# Altium PCB Wakame.PcbDoc (part 1 of 2)
Units mm, origin at the board's own origin, x right, y up, seen from the top; angles counter-clockwise.
Board outline 150 x 150 mm, 5 copper layers (FrontLayer, MidLayer1, MidLayer2, MidLayer3, BackLayer); 108 components, 145 nets, 766 pads, 136 vias.
Unrouted connection lines stored in the file: 5.
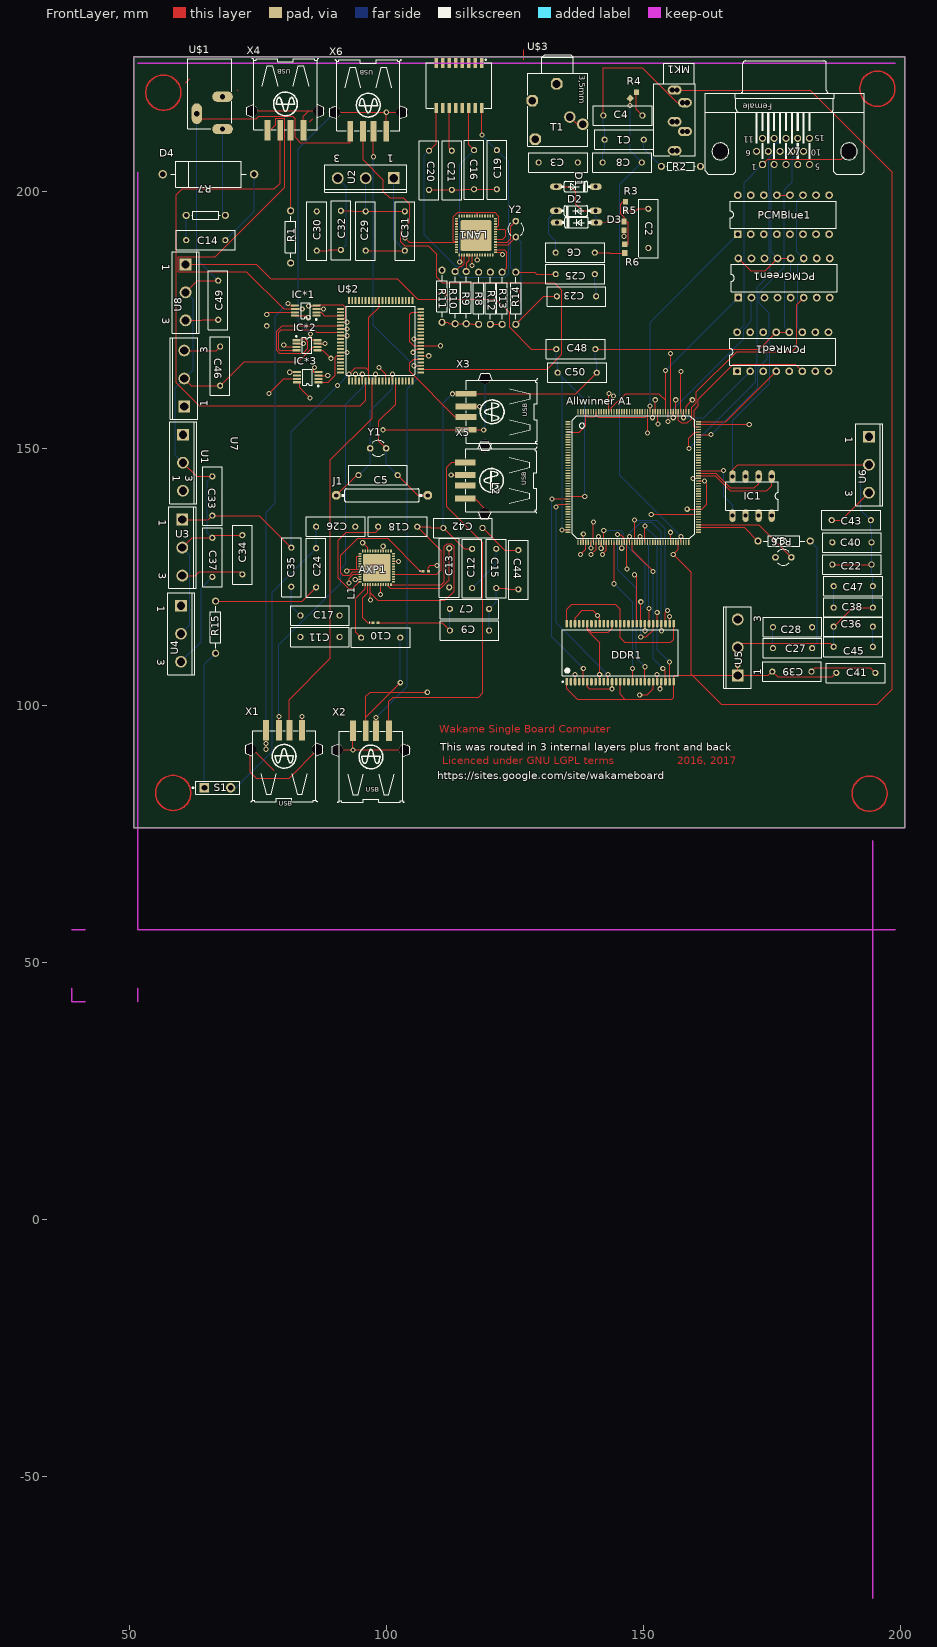
[diagram p0: FrontLayer view]
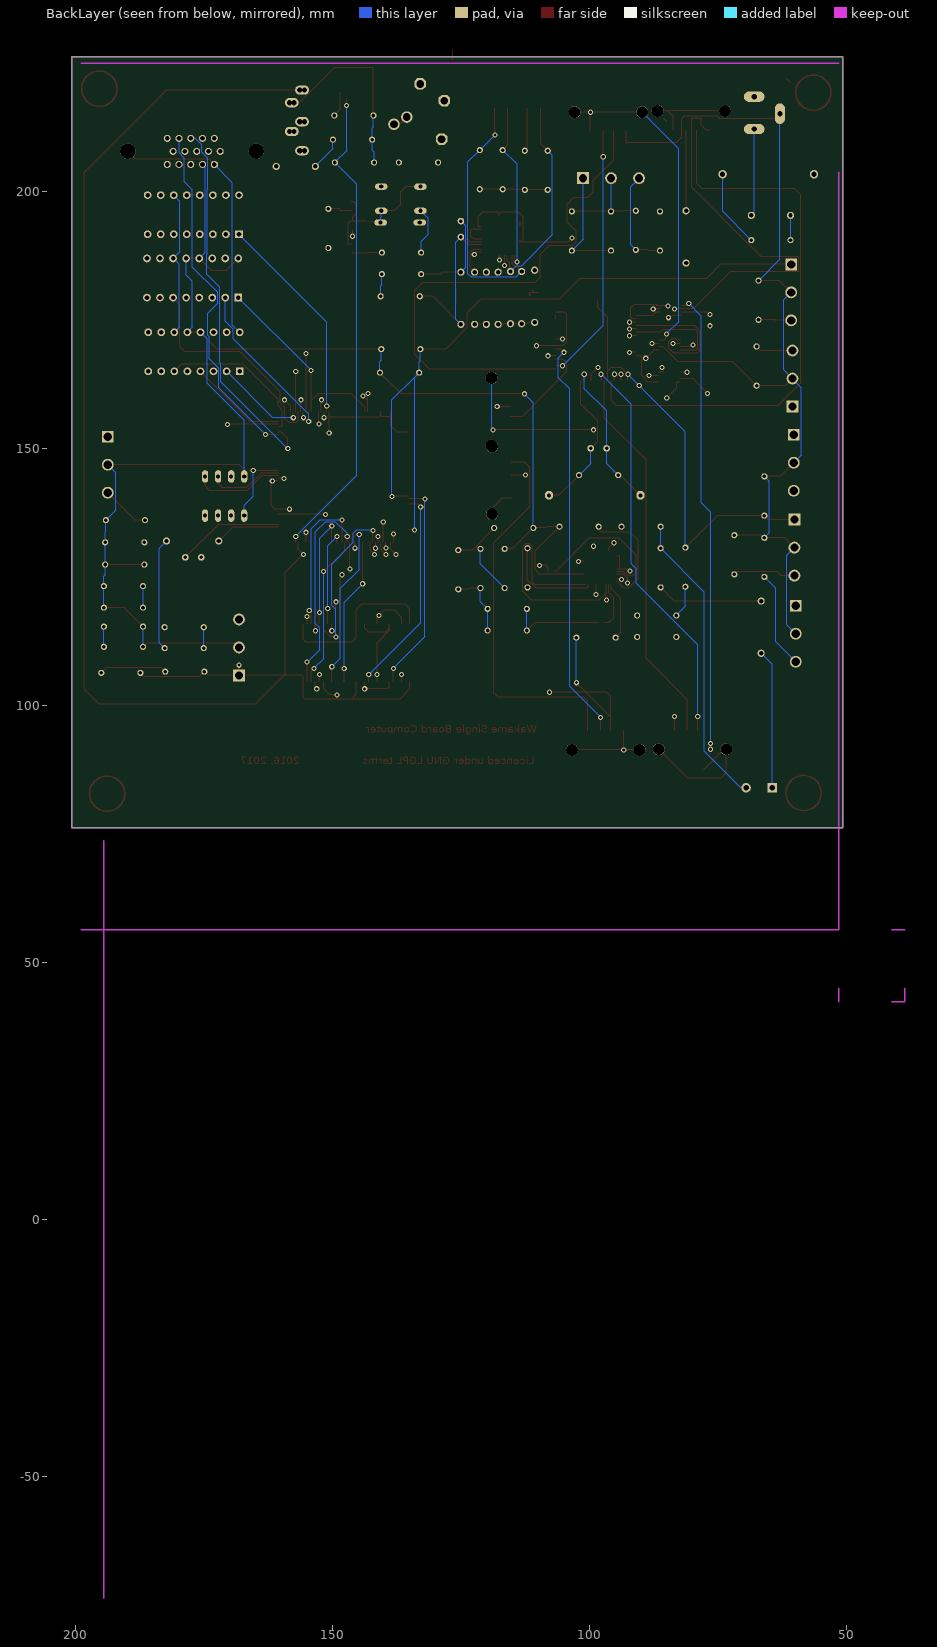
[diagram p1: BackLayer view, seen from below]
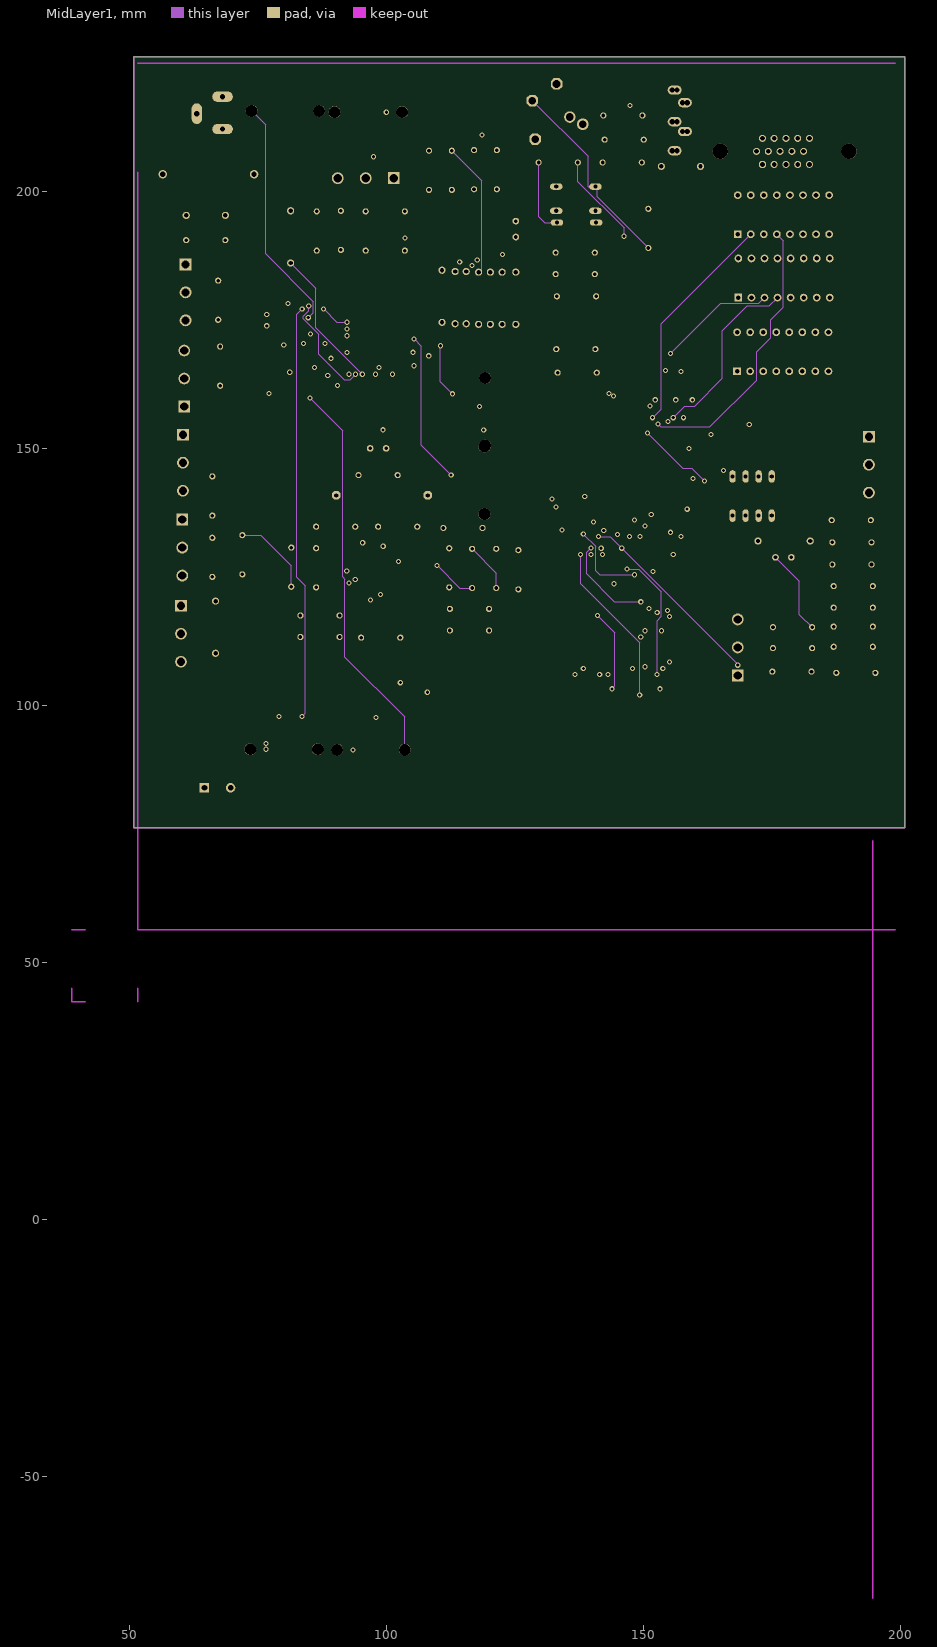
[diagram p2: MidLayer1]
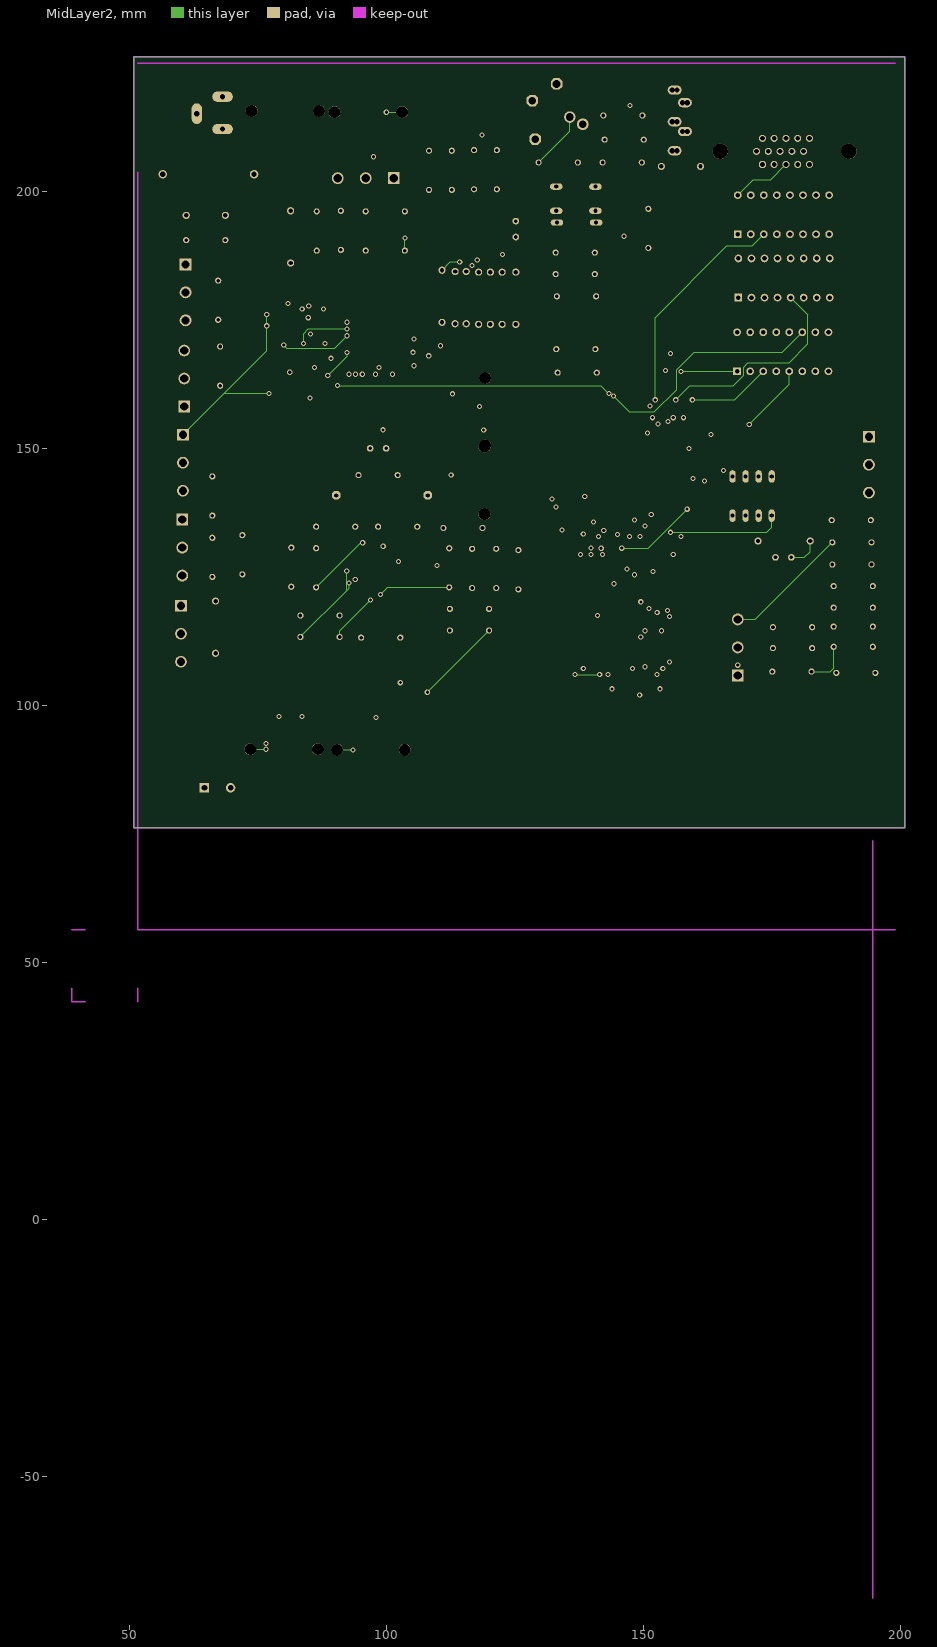
[diagram p3: MidLayer2]
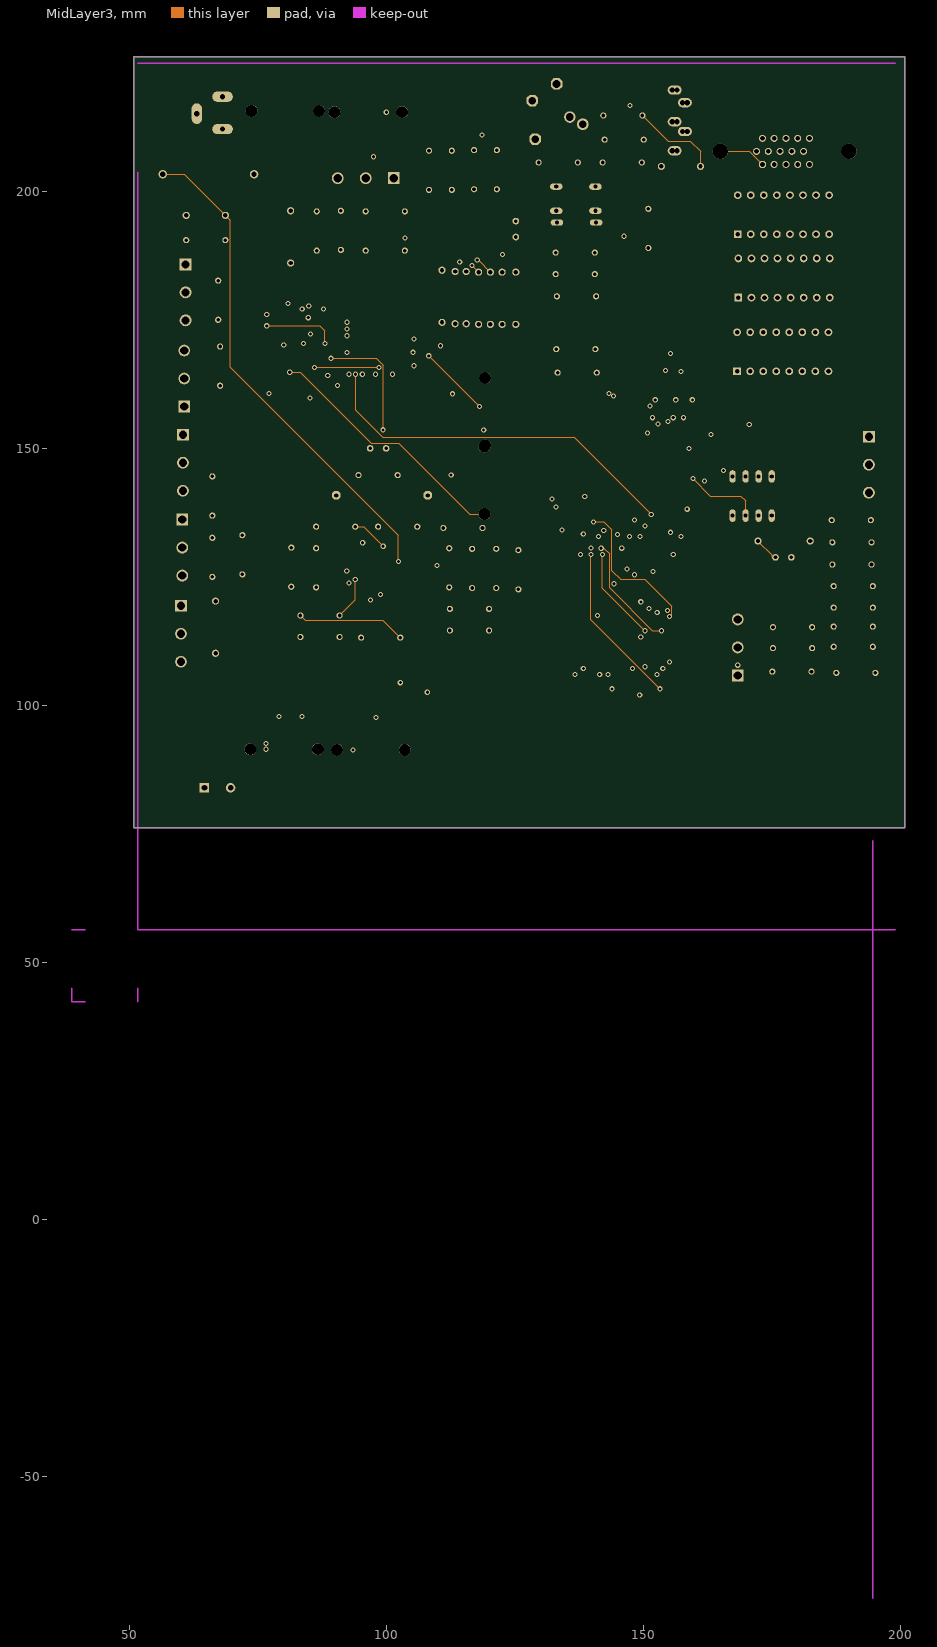
[diagram p4: MidLayer3]

## Layer stack, top to bottom
FrontLayer: signal copper 0.0356
Dielectric: prepreg 0.32, FR-4, Dk 4.8
MidLayer1: signal copper 0.0356
Dielectric: prepreg 0.32, FR-4, Dk 4.8
MidLayer2: signal copper 0.0356
Dielectric: prepreg 0.32, FR-4, Dk 4.8
MidLayer3: signal copper 0.0356
Dielectric: core 0.32, FR-4, Dk 4.8
BackLayer: signal copper 0.0356

## Board outline
50.8,76.2 200.8,76.2 200.8,226.2 50.8,226.2

## Design rules (kind name [scope] priority, off if disabled: settings)
Clearance [All] p1: gap=0.2
PolygonConnect [All] p1: connectstyle=Relief reliefconductorwidth=0.254 reliefentries=4 polygonreliefangle="90 Angle"
RoutingLayers RoutingLayers_1 [All] p1: top layer_v5=TRUE mid layer 1_v5=TRUE mid layer 2_v5=TRUE mid layer 3_v5=TRUE bottom layer_v5=TRUE
RoutingLayers [All] p2: top layer_v5=TRUE mid layer 1_v5=FALSE mid layer 2_v5=FALSE mid layer 3_v5=FALSE bottom layer_v5=FALSE
RoutingVias [All] p1: holewidth=0.6 width=1 viastyle="Through Hole" minholewidth=0.711 minwidth=1.27 maxholewidth=0.711 maxwidth=1.27
SilkscreenOverComponentPads [IsPad] p1: minsilkscreentomaskgap=0.254
SolderMaskExpansion [All] p1: expansion=0.102
TestPointUsage [All] p1: valid=0 allowmultiple=FALSE
Testpoint [All] p1: side=3 testpointundercomponent=TRUE minsize=1.016 maxsize=2.54 preferedsize=1.524 minholesize=0 maxholesize=1.016 preferedholesize=0.813 testpointgrid=0.025 style=297 order=0-112345678
Width [All] p1: maxlimit=0.2 minlimit=0.2 preferedwidth=0.2
22 further rules are at their usual default settings.

## Components (designator, comment, footprint, x,y, rotation, side; value= is the part's Value field where it differs from the comment)
"Allwinner A1" "ALLWINNER-A13" PG-LQFP-176-2 147.955,144.399 r0 top (schematic designator "Allwinner A13")
AXP1 "AXP202" QFN48 100.584,129.286 r0 top (schematic designator AXP202)
C1 "Cap" RAD-0.3 146.177,210.058 r180 top
C2 "." RAD-0.3 150.876,192.786 r90 top
C3 "." RAD-0.3 133.35,205.613 r0 top
C4 "Cap" RAD-0.3 145.923,214.757 r180 top
C5 "Cap" RAD-0.3 98.298,144.78 r0 top
C6 "." RAD-0.3 136.652,188.087 r0 top
C7 "Cap" RAD-0.3 116.078,118.745 r0 top (schematic designator C34)
C8 "Cap" RAD-0.3 145.796,205.613 r180 top
C9 "Cap" RAD-0.3 116.078,114.554 r0 top
C10 "Cap" RAD-0.3 98.806,113.157 r0 top
C11 "Cap" RAD-0.3 86.995,113.284 r180 top
C12 "Cap" RAD-0.3 116.586,126.619 r90 top
C13 "Cap" RAD-0.3 112.141,126.746 r270 top
C14 "Cap" RAD-0.3 64.77,190.5 r0 top
C15 "Cap" RAD-0.3 121.285,126.619 r270 top (schematic designator C23)
C16 "Cap" RAD-0.3 116.967,204.216 r270 top
C17 "Cap" RAD-0.3 86.995,117.475 r180 top
C18 "Cap" RAD-0.3 102.108,134.747 r0 top (schematic designator C38)
C19 "Cap" RAD-0.3 121.412,204.216 r270 top
C20 "Cap" RAD-0.3 108.204,204.089 r270 top
C21 "Cap" RAD-0.3 112.649,204.089 r270 top
C22 "Cap" RAD-0.3 190.5,127.381 r180 top
C23 "Cap" RAD-0.3 136.906,179.578 r180 top
C24 "Cap" RAD-0.3 86.233,126.746 r90 top
C25 "Cap" RAD-0.3 136.652,183.896 r0 top
C26 "Cap" RAD-0.3 90.043,134.747 r180 top
C27 "Cap" RAD-0.3 178.943,111.125 r180 top (schematic designator C31)
C28 "Cap" RAD-0.3 178.943,115.189 r0 top
C29 "Cap" RAD-0.3 95.885,192.278 r270 top
C30 "Cap" RAD-0.3 86.36,192.278 r270 top
C31 "Cap" RAD-0.3 103.505,192.278 r270 top
C32 "Cap" RAD-0.3 91.059,192.405 r90 top
C33 "Cap" RAD-0.3 66.04,140.716 r270 top (schematic designator C50)
C34 "Cap" RAD-0.3 71.882,129.286 r90 top
C35 "Cap" RAD-0.3 81.407,126.873 r90 top
C36 "Cap" RAD-0.3 190.754,111.379 r0 top
C37 "Cap" RAD-0.3 66.04,128.778 r90 top
C38 "Cap" RAD-0.3 190.754,115.316 r0 top
C39 "Cap" RAD-0.3 178.816,106.553 r180 top
C40 "Cap" RAD-0.3 190.5,131.699 r0 top (schematic designator C47)
C41 "Cap" RAD-0.3 191.262,106.299 r180 top
C42 "Cap" RAD-0.3 114.808,134.493 r0 top
C43 "Cap" RAD-0.3 190.373,136.017 r0 top
C44 "Cap" RAD-0.3 125.603,126.365 r90 top
C45 "Cap" RAD-0.3 190.754,118.999 r180 top
C46 "Cap" RAD-0.3 67.564,165.989 r270 top
C47 "Cap" RAD-0.3 190.754,123.19 r180 top
C48 "Cap" RAD-0.3 136.779,169.291 r180 top
C49 "Cap" RAD-0.3 67.183,178.816 r90 top
C50 "Cap" RAD-0.3 137.033,164.719 r180 top
D1 "." DIODE_DO35-7 136.779,200.914 r180 top
D2 "." DIODE_DO35-7 136.779,196.215 r0 top
D3 "." DIODE_DO35-7 136.906,193.929 r0 top
D4 "D Zener" DIODE-0.7 65.278,203.327 r180 top
DDR1 "K4S510432B-TC75" 54_TSOP2_400AF_N 145.415,110.236 r90 top
IC1 "AT25*P" DIL08 171.069,140.716 r180 top
IC*1 "Micrel MIC2026" 8uSOP 84.201,176.784 r90 top
IC*2 "Micrel MIC2026" 8uSOP 84.455,170.053 r270 top
IC*3 "Micrel MIC2026" 8uSOP 84.582,163.83 r90 top
J1 "ZeroOhm" 0R/10 100.33,140.843 r180 top (schematic designator J25)
L1 "Inductor" 0402-A 97.79,116.078 r0 top
L2 "Inductor" 0402-A 107.569,126.111 r0 top
LAN1 "LAN9500" QFN56 117.348,191.389 r90 top (schematic designator LAN9500)
MK1 "Mic2" ST-3150-5N 156.845,224.9 r0 top
PCMBlue1 "AD558JD" DIP16 177.165,195.453 r0 top
PCMGreen1 "AD558JD" DIP16 177.292,183.134 r0 top
PCMRed1 "AD558JD" DIP16 177.038,168.783 r0 top
R1 "Res2" AXIAL-0.4 81.28,191.135 r270 top
R2 "Res1" AXIAL-0.3 157.226,204.851 r180 top
R3 "Res3" J1-0603#1 146.431,197.104 r90 top
R4 "Res3" J1-0603#2 147.955,218.694 r45 top
R5 "Res3" J1-0603#1 146.177,193.294 r90 top
R6 "Res3" J1-0603#1 146.304,188.849 r90 top
R7 "Res1" AXIAL-0.3 64.77,195.326 r180 top
R8 "Res2" AXIAL-0.4 117.856,179.197 r90 top (schematic designator R2)
R9 "Res2" AXIAL-0.4 115.443,179.324 r90 top
R10 "Res2" AXIAL-0.4 113.284,179.324 r90 top
R11 "Res2" AXIAL-0.4 110.744,179.578 r90 top
R12 "Res2" AXIAL-0.4 120.142,179.197 r90 top
R13 "Res2" AXIAL-0.4 122.428,179.197 r270 top
R14 "Res2" AXIAL-0.4 125.095,179.197 r270 top
R15 "Res2" AXIAL-0.4 66.675,115.189 r270 top
R16 "Res2" AXIAL-0.4 177.292,131.953 r180 top
S1 "SW-PB" SPST-2 67.056,83.947 r0 top
T1 "749010012A" 749010012A 114.046,220.599 r180 top
U1 "L78L05ABZ" MAX247 60.325,147.193 r270 top
U2 "3.3V positive regulator" MAX247 95.885,202.565 r180 top
U3 "3.3V positive regulator (VCC)" MAX247 60.198,130.683 r270 top
U4 "3.0V positive regulator" MAX247 59.944,113.919 r270 top
U5 "1.3V positive regulator (VDD)" MAX247 168.275,111.252 r90 top
U6 "1.2V positive regulator" MAX247 193.802,146.812 r270 top
U7 "1.5V positive regulator" MAX247 60.579,163.576 r90 top
U8 "2.0V positive regulator" MAX247 60.833,180.34 r270 top
U$1 "PWR" SCD-014-A 65.532,225.933 r180 top (schematic designator U$6)
U$2 "USB2507" TQFP80 98.806,170.942 r180 top (schematic designator U$3)
U$3 "35MMSTEREOJACK" PG203J 143.383,218.44 r0 top (schematic designator U$4)
X1 "USB-A003" USB-A003 80.01,81.153 r0 top
X2 "USB-A003" USB-A003 96.901,81.026 r0 top (schematic designator X1)
X3 "USB-A003" USB-A003 129.413,157.099 r90 top
X4 "USB-A003" USB-A003 80.264,225.933 r180 top
X5 "USB-A003" USB-A003 129.286,143.764 r90 top
X6 "USB-A003" USB-A003 96.393,225.679 r180 top
X7 "HF15H" HDF15H 177.419,207.772 r180 top (schematic designator X1)
Y1 "XTAL" R38 98.298,149.987 r90 top
Y2 "XTAL" R38 125.095,192.659 r0 top
Y3 "XTAL" R38 177.165,128.778 r270 top

## Footprints (in the part's own frame and the unit in brackets; to place one, negate y for a bottom-side part, rotate by r counter-clockwise, add the part's x,y. Pads: shape width x height; smd on the part's side, far side on the other; paste and mask are expansions set on the pad)
0R/10 [mil]
  oct 63x63 hole 32: 1(-300,0) 2(400,0)
  silkscreen extent -262,-50 362,50
8uSOP [mm] "Shrink Small Outline; 8 Leads; Body Width 3 mm; Pitch 0.65 mm"
  rect 0.4x1.55 smd: 1(-0.975,-2.075) 2(-0.325,-2.075) 3(0.325,-2.075) 4(0.975,-2.075) 5(0.975,2.075) 6(0.325,2.075) 7(-0.325,2.075) 8(-0.975,2.075)
  silkscreen extent -1.85,-2.2 1.55,0.9
54_TSOP2_400AF_N [mm] "54-Pin Small Outline Package 0.8 mm Pitch, IPC Medium Density"
  oval 1.5x0.5 smd: 1(-5.65,10.4) 2(-5.65,9.6) 3(-5.65,8.8) 4(-5.65,8) 5(-5.65,7.2) 6(-5.65,6.4) 7(-5.65,5.6) 8(-5.65,4.8) 9(-5.65,4) 10(-5.65,3.2) 11(-5.65,2.4) 12(-5.65,1.6) 13(-5.65,0.8) 14(-5.65,0) 15(-5.65,-0.8) 16(-5.65,-1.6) 17(-5.65,-2.4) 18(-5.65,-3.2) 19(-5.65,-4) 20(-5.65,-4.8) 21(-5.65,-5.6) 22(-5.65,-6.4) 23(-5.65,-7.2) 24(-5.65,-8) 25(-5.65,-8.8) 26(-5.65,-9.6) 27(-5.65,-10.4) 28(5.65,-10.4) 29(5.65,-9.6) 30(5.65,-8.8) 31(5.65,-8) 32(5.65,-7.2) 33(5.65,-6.4) 34(5.65,-5.6) 35(5.65,-4.8) 36(5.65,-4) 37(5.65,-3.2) 38(5.65,-2.4) 39(5.65,-1.6) 40(5.65,-0.8) 41(5.65,0) 42(5.65,0.8) 43(5.65,1.6) 44(5.65,2.4) 45(5.65,3.2) 46(5.65,4) 47(5.65,4.8) 48(5.65,5.6) 49(5.65,6.4) 50(5.65,7.2) 51(5.65,8) 52(5.65,8.8) 53(5.65,9.6) 54(5.65,10.4)
  silkscreen extent -5.77,-11.3 4.5,11.32, body extent -5.08,-11.23 5.08,11.23, height 1.2
0402-A [mm] "Chip Inductor; Body 1 x 0.5 mm (LxW typ)"
  rect 0.6x0.5 smd: 1(-0.5,0) 2(0.5,0)
  silkscreen extent -1.1,-0.15 -1.1,0.15
749010012A [mm] "10/100 Base-T SMD Transformer 1 Port"
  rect 0.64x1.91 smd: 1(-4.445,-4.385) 2(-3.175,-4.385) 3(-1.905,-4.385) 4(-0.635,-4.385) 5(0.635,-4.385) 6(1.905,-4.385) 7(3.175,-4.385) 8(4.445,-4.385) 9(4.445,4.385) 10(3.175,4.385) 11(1.905,4.385) 12(0.635,4.385) 13(-0.635,4.385) 14(-1.905,4.385) 15(-3.175,4.385) 16(-4.445,4.385)
  silkscreen extent -6.35,-5.1 6.35,4.4, body extent -6.35,-4.7 6.35,4.7, height 6.35
AXIAL-0.3 [mm] "Resistor; 2 Leads"
  round 1.4 hole 0.85: 1(-3.81,0) 2(3.81,0)
  silkscreen extent -2.77,-0.76 2.77,0.76
AXIAL-0.4 [mm] "Resistor; 2 Leads"
  round 1.4 hole 0.85: 1(-5.08,0) 2(5.08,0)
  silkscreen extent -4.06,-1.02 4.06,1.02
DIL08 [mil]
  oval 48x96 hole 32: 1(-150,-150) 2(-50,-150) 3(50,-150) 4(150,-150) 5(150,150) 6(50,150) 7(-50,150) 8(-150,150)
  silkscreen extent -200,-110 200,110
DIODE-0.7 [mm] "Zener Diode; 2 Leads"
  round 1.65 hole 1: 1(-8.89,0) 2(8.89,0)
  silkscreen extent -7.37,-2.54 7.37,2.54
DIODE_DO35-7 [mil]
  oval 96x48 hole 32: A(150,0) C(-150,0)
  silkscreen extent -115,-40 115,40
DIP16 [mm] "DIP; 16 Leads; Row Spacing 7.62 mm; Pitch 2.54 mm"
  rect 1.5x1.5 hole 0.9: 1(-8.89,-3.81)
  round 1.5 hole 0.9: 2(-6.35,-3.81) 3(-3.81,-3.81) 4(-1.27,-3.81) 5(1.27,-3.81) 6(3.81,-3.81) 7(6.35,-3.81) 8(8.89,-3.81) 9(8.89,3.81) 10(6.35,3.81) 11(3.81,3.81) 12(1.27,3.81) 13(-1.27,3.81) 14(-3.81,3.81) 15(-6.35,3.81) 16(-8.89,3.81)
  silkscreen extent -10.3,-2.65 10.3,2.65
HDF15H [mil]
  round 119 hole 119: 1(-492.13,0) 1(493,0)
  oct 54x54 hole 36: 1(171,100)
  round 54 hole 36: 2(81,100) 3(-9.57,100) 4(-99.57,100) 5(-189.57,100) 6(216,0) 7(126,0) 8(36,0) 9(-54.57,0) 10(-144.57,0) 11(171,-100) 12(81,-100) 13(-9.57,-100) 14(-99.57,-100) 15(-189.57,-100)
  silkscreen extent -610,-693 610,175
J1-0603#1 [mm] "Chip Resistor; Body 1.6 x 0.8 mm (LxW typ)"
  rect 1.1x1 smd: 1(-0.85,0) 2(0.85,0)
J1-0603#2 [mm] "Chip Resistor; Body 1.6 x 0.8 mm (LxW typ)"
  rect 1.1x1 smd: 1(-0.85,0)
  rect 1x1.1 smd rot 135: 2(0.85,0)
MAX247 [mm] "SIP; 3 Leads; Body 20 x 15.6 x 5 mm (typ); Pitch 5.45 mm"
  rect 2.3x2.3 hole 1.6: 1(-5.45,0)
  round 2.3 hole 1.6: 2(0,0) 3(5.45,0)
  silkscreen extent -7.95,-2.6 7.95,2.7
PG203J [mil]
  oct 88.5x88.5 hole 59: GND(-408,97) LEFT1(-572,-326) LEFT2(-593,-31)
  round 88.5 hole 59: RIGHT1(-207,-212) RIGHT2(-306,-157)
  silkscreen extent -630,-380 -170,320
PG-LQFP-176-2 [mil]
  rect 10x40 smd: AGND(247,-500) AVCC(286,-500) DDR3_A0(-49.21,-500) DDR3_A1(-285.43,-500) DDR3_A2(-9.84,-500) DDR3_A3(-29.53,-500) DDR3_A4(-305.12,-500) DDR3_A5(10,-500) DDR3_A6(-246.06,-500) DDR3_A7(89,-500) DDR3_A8(-226.38,-500) DDR3_A9(50,-500) DDR3_A10(-364.17,-500) DDR3_A11(-206.69,-500) DDR3_A12(-324.8,-500) DDR3_A13(30,-500) DDR3_A14(-187.01,-500) DDR3_BA0(-68.9,-500) DDR3_BA1(-344.49,-500) DDR3_BA2(-108.27,-500) DDR3_CAS(-147.64,-500) DDR3_CK(-423.23,-500) DDR3_CK_N(-403.54,-500) DDR3_CKE(-383.86,-500) DDR3_ODT(109,-500) DDR3_RAS(-167.32,-500) DDR3_RST(69,-500) DDR3_WE(-127.95,-500) HPBP(168,-500) HPCOM(207,-500) HPOUTL(148,-500) HPOUTR(227,-500) LCD_D2/PD2(128,500) LCD_D3/PD3(148,500) LCD_D4/PD4(168,500) LCD_D5/PD5(188,500) LCD_D6/PD6(207,500) LCD_D7/PD7(227,500) LCD_D10/PD10(266,500) LCD_D11/PD11(286,500) LCD_D12/PD12(306,500) LCD_D13/PD13(325,500) LCD_D14/PD14(345,500) LCD_D15/PD15(365,500) LCD_D18/PD18(384,500) LCD_D19/PD19(404,500) LCD_D20/PD20(424,500) LRADC(384,-500) MICIN1(345,-500) NDQ0/SDC2_D0/PC8(-383.86,500) NDQ1/SDC2_D1/PC9(-344.49,500) NDQ2/SDC2_D2/PC10(-324.8,500) NDQ3/SDC2_D3/PC11(-305.12,500) NDQ4/SDC2_D4/PC12(-265.75,500) NDQ5/SDC2_D5/PC13(-246.06,500) NDQ6/SDC2_D6/PC14(-226.38,500) NDQ7/SDC2_D7/PC15(-206.69,500) NDQS/PC19(-147.64,500) NMI_N(-68.9,500) NRB0/SDC2_CMD/PC6(-423.23,500) NRB1/SDC2_CLK/PC7(-403.54,500) PB3/EINT17(89,500) PB17(-127.95,500) PB18(-108.27,500) PG0/EINT0(-9.84,500) PG1/EINT1(10,500) PG2/EINT2(30,500) PG3/UART1_TX/EINT3(50,500) PG4/UART1_RX/EINT14(69,500) RESET_N(-88.58,500) TPX2(404,-500) TPY2(424,-500) UBOOT(-49.21,500) V33_HP(188,-500) VCC3(247,500) VCC4(-167.32,500) VCC4_DRAM(-265.75,-500) VCC5_DRAM(-88.58,-500) VDD2_INT(128,-500) VDD5_CPU(-29.53,500) VDD5_INT(109,500) VDD6_CPU(-187.01,500) VDD7_CPU(-285.43,500) VDD8_CPU(-364.17,500) VMIC(365,-500) VRA1(325,-500) VRA2(306,-500) VRP(266,-500)
  rect 40x10 smd: CSI_D0/SDC_D0/PE4(500,148) CSI_D2/SDC2_D2/PE6(500,188) CSI_D3/SDC2_D3/PE7(500,207) CSI_D4/SDC2_CMD/PE8(500,227) CSI_D5/SDC2_CLK/PE9(500,247) CSI_D6/UART1_TX/PE10(500,266) CSI_D7/UART1_RX/PE11(500,286) CSI_DI/SDC2_DI/PE5(500,168) CSI_HSYNC/SP2_MOSI/P(500,109) CSI_MCLK/SPI2_CLK/EI(500,89) CSI_PCLK/SPI2_CS0/EI(500,69) CSI_VSYNC/SPI2_MISO/(500,128) DDR3_D0(-500,10) DDR3_D1(-500,-344.49) DDR3_D2(-500,30) DDR3_D3(-500,-364.17) DDR3_D4(-500,69) DDR3_D5(-500,-423.23) DDR3_D6(-500,50) DDR3_D7(-500,-383.86) DDR3_D9(-500,-49.21) DDR3_D10(-500,-324.8) DDR3_D11(-500,-29.53) DDR3_D12(-500,-265.75) DDR3_D13(-500,-68.9) DDR3_D14(-500,-305.12) DDR3_D15(-500,-88.58) DDR3_DM0(-500,-127.95) DDR3_DM1(-500,-108.27) DDR3_DQS0(-500,-167.32) DDR3_DQS0_N(-500,-187.01) DDR3_DQS1(-500,-206.69) DDR3_DQS1_N(-500,-226.38) DDR3_R8(-500,-285.43) DZQ(-500,109) LCD_CLK/PD24(500,365) LCD_D21/PD21(500,424) LCD_D22/PD22(500,404) LCD_D23/PD23(500,384) LCD_DE/PD25(500,345) LCD_HSYNC/PD26(500,325) LCD_VSYNC/PD27(500,306) NALE/SPIO_MISO/PCI(-500,306) NC(500,-226.38) NCE0(-500,404) NCE1/SPIO0/PC3(-500,384) NCLE/SPIO_CLK/PC2(-500,325) NRE(-500,424) NWE/SPIO_MOSI/PC0(-500,286) PB2/EINT16(500,-147.64) PB4_EINT18(500,-127.95) PB10/EINT24(-500,247) PB15(500,-108.27) PB16(500,-88.58) PG9/SPI1_CS0/UART3_T(-500,207) PG10/SPI1_CLK/UART3_(-500,188) PG11/SPI1_MOSI/EINT1(-500,168) PG12/SPI1_MISO/UART3(-500,148) SDC0/PF1(500,-49.21) SDC0_CLK/PF2(500,-9.84) SDC0_CMD/PF3(500,10) SDC0_D3/PF4(500,30) SDC0_DI/PF0(500,-68.9) SDCO_D2/PF5(500,50) SVREF(-500,89) TPX1(500,-423.23) TPY1(500,-403.54) TWI0-SCK/PB0(500,-187.01) TWIO-SDA/PB1(500,-167.32) UDM0(500,-344.49) UDM1(500,-305.12) UDP0(500,-324.8) UDP1(500,-285.43) V33_USB(500,-265.75) VCC1(-500,345) VCC1_DRAM(-500,-9.84) VCC2(500,-206.69) VCC2_DRAM(-500,-147.64) VCC3_DRAM(-500,-403.54) VDD1_CPU(-500,365) VDD1_INT(-500,-246.06) VDD2_CPU/PB10/EINT24(-500,266) VDD3-INT(500,-246.06) VDD3_CPU(-500,227) VDD4_CPU(-500,128) VDD4_INT(500,-29.53) X24MIN(500,-364.17) X24OUT(500,-383.86)
  silkscreen extent -512,-468 469,469
QFN48 [mil]
  rrect30% 22x12 smd: ACIN(29,-50.79) ACIN1(29,-70.47) BACKUP(29,-109.84) CHGLED(29,9) DC3SET(29,-129.53) DCDC2(-228.94,-168.9) GPIO2(-228.94,-70.47) GPIO3(-228.94,-31.1) IPSOUT(29,-11.42) IPSOUT1(29,-31.1) LDO1(29,-149.21) LDO2(-228.94,-208.27) LDO4(-228.94,-188.58) LX2(-228.94,-129.53) N_OE(-228.94,-50.79) N_VBUSEN(-228.94,-90.16) PGND2(-228.94,-149.21) PWREN(29,-168.9) PWROK(29,-208.27) SCK(-228.94,-11.42) SDA(-228.94,9) VBUS(29,-90.16) VIN2(-228.94,-109.84) VINT(29,-188.58)
  rrect30% 12x22 smd: AGND(-31.1,-228.94) APS(-50.79,-228.94) BAT(-11.42,29) BAT1(-31.1,29) BATSENSE(-90.16,29) BIAS(-11.42,-228.94) CHSENSE(-109.84,29) DCDC3(-129.53,-228.94) EXTEN(-70.47,-228.94) GPIO0(-90.16,-228.94) GPIO1(-109.84,-228.94) IRQ(-208.27,29) LDO3(-70.47,29) LDO3IN(-50.79,29) LDO24IN(-208.27,-228.94) LX(-168.9,-228.94) LX1(-149.21,29) PGND1(-168.9,29) PGND3(-149.21,-228.94) PWRON(-188.58,29) TS(9,29) VIN1(-129.53,29) VIN3(-188.58,-228.94) VREF(9,-228.94)
  rrect5% 209x209 smd: EXP(-100,-100)
QFN56 [mil]
  rrect50% 24x12 smd: 1(-149.61,128) 2(-149.61,109) 3(-149.61,89) 4(-149.61,69) 5(-149.61,50) 6(-149.61,30) 7(-149.61,10) 8(-149.61,-9.84) 9(-149.61,-29.53) 10(-149.61,-49.21) 11(-149.61,-68.9) 12(-149.61,-88.58) 13(-149.61,-108.27) 14(-149.61,-127.95) 29(150,-127.95) 30(150,-108.27) 31(150,-88.58) 32(150,-68.9) 33(150,-49.21) 34(150,-29.53) 35(150,-9.84) 36(150,10) 37(150,30) 38(150,50) 39(150,69) 40(150,89) 41(150,109) 42(150,128)
  rrect50% 12x24 smd: 15(-127.95,-149.61) 16(-108.27,-149.61) 17(-88.58,-149.61) 18(-68.9,-149.61) 19(-49.21,-149.61) 20(-29.53,-149.61) 21(-9.84,-149.61) 22(10,-149.61) 23(30,-149.61) 24(50,-149.61) 25(69,-149.61) 26(89,-149.61) 27(109,-149.61) 28(128,-149.61) 43(128,150) 44(109,150) 45(89,150) 46(69,150) 47(50,150) 48(30,150) 49(10,150) 50(-9.84,150) 51(-29.53,150) 52(-49.21,150) 53(-68.9,150) 54(-88.58,150) 55(-108.27,150) 56(-127.95,150)
  rrect10% 237x237 smd: EPAD(0,0)
R38 [mm] "Crystal, Thru-Hole; 2 Leads; Body 3.1 x 8.2 mm (Dia.xH)"
  round 1.3 hole 0.7: 1(0,1.55) 2(0,-1.55)
  silkscreen extent -1.55,-1.19 1.55,1.17
RAD-0.3 [mm] "Capacitor; 2 Leads"
  round 1.2 hole 0.7: 1(-3.81,0) 2(3.81,0)
  silkscreen extent -5.71,-1.91 5.71,1.91
SCD-014-A [mil]
  oval 158x79 hole 40: +(-98.43,544) GND1(-98.43,296)
  oval 79x158 hole 40: GND(99,426)
  silkscreen extent -167,4 168,540
SPST-2 [mm] "Circuit Breaker; 2 Leads"
  rect 1.85x1.85 hole 1.1: 1(-2.54,0)
  round 1.85 hole 1.1: 2(2.54,0)
  silkscreen extent -4.89,-1.27 4.28,1.27
ST-3150-5N [mm] "Connector; Stereo Jack, 3.5mm, 5 Position"
  oval 2.7x1.8 all layers, no hole: 1(-0.85,-5.2) 2(1.15,-7.65) 3(-0.85,-11.35) 4(1.15,-13.25) 5(-0.85,-17)
  round 1.2 hole 1: 1A(-1.3,-5.2) 1B(-0.4,-5.2) 2A(0.7,-7.65) 2B(1.6,-7.65) 3A(-1.3,-11.35) 3B(-0.4,-11.35) 4A(0.7,-13.25) 4B(1.6,-13.25) 5A(-1.3,-17) 5B(-0.4,-17)
  silkscreen extent -4.9,-18 3.2,0
TQFP80 [mil]
  rect 14x52 smd: AM1/GANG_EN(-191.93,-307.09) AM2/MTT_EN(-140.75,-307.09) AM3(-89.57,-307.09) AM4/LED_EN(-38.39,-307.09) AM5(90,-307.09) AM6(141,-307.09) AM7(192,-307.09) ATEST/REG_EN(-191.93,308) GR1/NON_REM0(-166.34,-307.09) GR2_NON_REM1(-115.16,-307.09) GR3/PRT_DIS0(-63.98,-307.09) GR4/PRT_DIS1(-12.8,-307.09) GR5(116,-307.09) GR6(167,-307.09) GR7(218,-307.09) PRTPWR1(244,-307.09) RBIAS(-217.52,308) SCL/SMBCLK/CFG_SEL0(-243.11,-307.09) SDA/SMBDATA(-217.52,-307.09) USBDN0(192,308) USBDN1(141,308) USBDN2(39,308) USBDP0(218,308) USBDP1(116,308) USBDP2(64,308) VDD18(64,-307.09) VDD18.2(-38.39,308) VDD33(13,-307.09) VDD33.3(244,308) VDDA18/PLL(-140.75,308) VDDA33.4(90,308) VDDA33/PLL(-166.34,308) VSS0(-243.11,308) VSS4(39,-307.09) VSS6(167,308) VSS7(13,308) VSS8(-12.8,308) VSS9(-63.98,308) XTAL1/CLKIN(-115.16,308) XTAL2(-89.57,308)
  rect 52x14 smd: CFG_SEL1(-307.09,-243.11) CLKIN_EN(308,167) OCS1_N(308,-243.11) OCS2_N(308,-191.93) OCS3_N(308,-140.75) OCS4_N(308,-89.57) OCS5_N(308,39) OCS6_N(308,90) OCS7_N(308,141) PRTPWR2(308,-217.52) PRTPWR3(308,-166.34) PRTPWR4(308,-115.16) PRTPWR5(308,-63.98) PRTPWR6(308,64) PRTPWR7(308,116) PRTPWR_POL(308,192) RESET_N(308,218) SELF_PWR(-307.09,-217.52) TEST0(-307.09,-166.34) TEST1(-307.09,-191.93) USBDN3(-307.09,192) USBDN4(-307.09,141) USBDN5(-307.09,39) USBDN6(-307.09,-12.8) USBDN7(-307.09,-115.16) USBDP3(-307.09,218) USBDP4(-307.09,116) USBDP5(-307.09,64) USBDP6(-307.09,-38.39) USBDP7(-307.09,-89.57) VBUS_DET(308,244) VDD18.3(308,-12.8) VDD33CR(308,13) VDDA3.1(-307.09,90) VDDA33(-307.09,244) VDDA33.2(-307.09,-63.98) VSS(-307.09,167) VSS1(-307.09,13) VSS3(-307.09,-140.75) VSS5(308,-38.39)
  silkscreen extent -264,-264 265,265
USB-A003 [mil]
  round 91 hole 91: 1(-258.66,405) 1(259,405)
  rect 45x158 smd: 1(-137.8,552) 2(-39.37,552) 3(40,552) 4(138,552)
  silkscreen extent -295,0 296,548

## Part data
AXP1: "Allwinner a13 pwr ic"
C1 C4 C5 C7 C8 C9 C10 C11 C12 C13 C14 C15 C16 C17 C18 C19 C20 C21 C22 C23 C24 C25 C26 C27 C28 C29 C30 C31 C32 C33 C34 C35 C36 C37 C38 C39 C40 C41 C42 C43 C44 C45 C46 C47 C48 C49 C50: "Capacitor"
C2 C3 C6: library part Cap, "Capacitor"
D1 D2 D3: library part SCHOTTKY-DIODEDO35-7
D4: "Zener Diode"
DDR1: "512Mb Synchronous High Data Rate DRAM, 32Mb x 4Bit x 4 Banks, 54-Pin TSOP"
IC1: "SPI bus serial <B>EEPROM</B>"
IC*1 IC*2 IC*3: library part MIC2026, "Micrel MIC2026 Dual-Channel Power Distribution Switch"
J1: library part 0R, "Bridge 0R 10mm"
MK1: "Microphone"
PCMBlue1 PCMGreen1 PCMRed1: "Imported"
R1 R3 R4 R5 R6 R7 R8 R9 R10 R11 R12 R13 R14 R15 R16: "Resistor"
R2: library part Res3, "Resistor"
S1: "Switch"
T1: "10/100 Base-T SMD Transformer 1 Port"
U1: "Positive Voltage Regulator"
U2 U3 U4 U5 U6 U7 U8: library part L78L05ABZ, "Positive Voltage Regulator"
U$1: "Main Power Jack"
U$2: "usb 2507 hub on chiip"
X1 X2 X3 X4 X5 X6: "<b>USB connector</b>"
X7: "<b>SUB-D</b>"
Y1 Y2 Y3: "Crystal Oscillator"

## Via types
v1: diameter 1, hole 0.6, FrontLayer to BackLayer, 136 vias

## Nets (pads, with @x,y where several pads share a name; then routed paths per layer and width w, separated by ;. In a path a pad name is that pad's centre, name@x,y a point inside that pad or via, vN(x,y) a via of type N, cw(c..) or ccw(c..) an arc to the next point about the centre after c; other vN are vias at no path point)
"NetAllwinner A1_AVCC": "Allwinner A1.AVCC" IC1.8 | length 24.3
  FrontLayer w0.2: 155.219,131.699 v1(155.219,133.655)
  MidLayer2 w0.2: v1(155.219,133.655) 173.939,133.655 174.879,134.595 IC1.8@174.879,136.906
"NetAllwinner A1_DDR3_A0": "Allwinner A1.DDR3_A0" DDR1.23 | length 31.6
  FrontLayer w0.2: v1(146.705,126.492) 146.705,131.699 ; v1(152.578,105.994) 152.615,105.957 DDR1.23@152.615,104.586
  MidLayer1 w0.2: v1(146.705,126.492) 149.022,126.492 153.441,122.072 153.441,117.297 152.578,116.434 v1(152.578,105.994)
"NetAllwinner A1_DDR3_A1": "Allwinner A1.DDR3_A1" DDR1.24 | length 36
  FrontLayer w0.2: v1(139.7,129.362) 140.705,130.367 140.705,131.699 ; v1(153.137,103.2) 153.415,103.479 DDR1.24@153.415,104.586
  MidLayer3 w0.2: v1(139.7,129.362) 139.7,116.637 v1(153.137,103.2)
"NetAllwinner A1_DDR3_A2": "Allwinner A1.DDR3_A2" DDR1.25 | length 29.8
  FrontLayer w0.2: 147.705,131.699 147.705,130.146 v1(151.803,126.047) ; v1(153.695,107.163) 154.215,106.643 DDR1.25@154.215,104.586
  BackLayer w0.2: v1(151.803,126.047) 151.803,109.055 v1(153.695,107.163)
"NetAllwinner A1_DDR3_A3": "Allwinner A1.DDR3_A3" DDR1.26 | length 40.2
  FrontLayer w0.2: 147.205,131.699 v1(147.205,132.842) ; DDR1.26@155.015,104.586 v1(155.015,108.407)
  BackLayer w0.2: v1(147.205,132.842) 147.205,133.438 149.416,135.649 151.507,135.649 153.403,133.752 153.403,115.9 152.578,115.075 152.578,110.844 v1(155.015,108.407)
"NetAllwinner A1_DDR3_A4": "Allwinner A1.DDR3_A4" DDR1.29 | length 34.2
  FrontLayer w0.2: 140.205,131.699 v1(140.205,135.687) ; DDR1.29@155.015,115.886 v1(155.015,117.245)
  MidLayer3 w0.2: v1(140.205,135.687) 142.24,135.687 143.789,134.137 143.789,126.213 145.491,124.511 150.139,124.511 155.423,119.227 155.423,117.653 v1(155.015,117.245)
"NetAllwinner A1_DDR3_A5": "Allwinner A1.DDR3_A5" DDR1.30 | length 29.9
  FrontLayer w0.2: 148.209,131.699 v1(148.209,136.049) ; DDR1.30@154.215,115.886 154.215,118.045 v1(154.61,118.44)
  BackLayer w0.2: v1(148.209,136.049) 152.546,136.049 154.203,134.391 154.203,118.847 v1(154.61,118.44)
"NetAllwinner A1_DDR3_A6": "Allwinner A1.DDR3_A6" DDR1.31 | length 24.8
  FrontLayer w0.2: v1(141.705,130.556) 141.705,131.699 ; DDR1.31@153.415,115.886 v1(153.416,114.503) v1(153.416,114.503)
  MidLayer3 w0.2: v1(141.705,130.556) 142.24,130.556 143.358,129.438 143.358,122.834 151.689,114.503 v1(153.416,114.503)
"NetAllwinner A1_DDR3_A7": "Allwinner A1.DDR3_A7" DDR1.32 | length 23.1
  FrontLayer w0.2: 150.216,131.699 v1(150.216,134.849) ; v1(152.603,118.085) 152.615,118.073 DDR1.32@152.615,115.886
  BackLayer w0.2: v1(150.216,134.849) 152.603,132.461 v1(152.603,118.085)
"NetAllwinner A1_DDR3_A8": "Allwinner A1.DDR3_A8" DDR1.33 | length 32.9
  FrontLayer w0.2: 142.205,131.699 v1(142.205,134.036) ; v1(149.403,113.309) 150.52,113.309 151.815,114.605 DDR1.33@151.815,115.886
  BackLayer w0.2: v1(142.205,134.036) 145.491,134.036 146.025,133.502 146.025,131.699 150.241,127.483 150.241,119.507 149.403,118.669 v1(149.403,113.309)
"NetAllwinner A1_DDR3_A9": "Allwinner A1.DDR3_A9" DDR1.34 | length 18.8
  FrontLayer w0.2: 149.225,131.699 v1(149.225,132.817) ; v1(151.003,118.847) 151.015,118.835 DDR1.34@151.015,115.886
  BackLayer w0.2: v1(149.225,132.817) 151.003,131.039 v1(151.003,118.847)
"NetAllwinner A1_DDR3_A10": "Allwinner A1.DDR3_A10" DDR1.22 | length 39.3
  FrontLayer w0.2: v1(137.693,129.362) 138.705,130.374 138.705,131.699 ; v1(149.2,102.032) 150.621,102.032 151.815,103.226 DDR1.22@151.815,104.586
  MidLayer1 w0.2: v1(137.693,129.362) 137.693,123.647 149.2,112.141 v1(149.2,102.032)
"NetAllwinner A1_DDR3_A11": "Allwinner A1.DDR3_A11" DDR1.35 | length 22.3
  FrontLayer w0.2: v1(141.935,129.362) 142.705,130.132 142.705,131.699 ; v1(150.216,114.503) DDR1.35@150.215,115.886
  MidLayer3 w0.2: v1(141.935,129.362) 141.935,122.784 v1(150.216,114.503)
"NetAllwinner A1_DDR3_A12": "Allwinner A1.DDR3_A12" DDR1.36 | length 23.5
  FrontLayer w0.2: v1(139.7,130.581) 139.705,130.586 139.705,131.699 ; DDR1.36@149.415,115.886 v1(149.415,120.13)
  MidLayer1 w0.2: v1(139.7,130.581) 138.862,129.743 138.862,125.552 144.284,120.13 v1(149.415,120.13)
"NetAllwinner A1_DDR3_BA0": "Allwinner A1.DDR3_BA0" DDR1.20 | length 33.3
  FrontLayer w0.2: v1(144.882,133.223) 145.491,133.223 146.205,132.509 146.205,131.699 ; DDR1.20@150.215,104.586 v1(150.215,107.493)
  BackLayer w0.2: v1(144.882,133.223) 144.882,126.416 148.565,122.733 148.565,109.144 v1(150.215,107.493)
"NetAllwinner A1_DDR3_CAS": "Allwinner A1.DDR3_CAS" DDR1.17 | length 28.6
  FrontLayer w0.2: v1(144.205,123.638) 144.205,131.699 ; v1(147.803,107.163) 147.815,107.15 DDR1.17@147.815,104.586
  BackLayer w0.2: v1(144.205,123.638) 147.803,120.04 v1(147.803,107.163)
"NetAllwinner A1_DDR3_CKE": "Allwinner A1.DDR3_CKE" DDR1.37 | length 27.3
  FrontLayer w0.2: 138.205,131.699 138.205,133.303 v1(138.227,133.325) ; v1(148.209,125.4) 148.615,124.993 DDR1.37@148.615,115.886
  MidLayer1 w0.2: v1(138.227,133.325) 140.614,130.937 140.614,126.213 141.427,125.4 v1(148.209,125.4)
"NetAllwinner A1_DDR3_DQS0": "Allwinner A1.DDR3_DQS0" DDR1.5 | length 41.3
  FrontLayer w0.2: v1(132.105,140.149) 135.255,140.149 ; DDR1.5@138.215,104.586 138.215,107.151 v1(138.227,107.163)
  BackLayer w0.2: v1(132.105,140.149) 132.105,113.284 v1(138.227,107.163)
"NetAllwinner A1_DDR3_DQS1": "Allwinner A1.DDR3_DQS1" DDR1.11 | length 40.8
  FrontLayer w0.2: v1(132.918,138.608) 133.459,139.149 135.255,139.149 ; DDR1.11@143.015,104.586 143.015,105.956 v1(143.027,105.969)
  BackLayer w0.2: v1(132.918,138.608) 132.918,116.078 v1(143.027,105.969)
"NetAllwinner A1_LCD_D2/PD2": "Allwinner A1.LCD_D2/PD2" PCMBlue1.1 | length 41.6
  FrontLayer w0.2: 151.206,157.099 v1(151.206,158.217)
  BackLayer w0.2: v1(151.206,158.217) 151.206,174.574 PCMBlue1.1@168.275,191.643
"NetAllwinner A1_LCD_D3/PD3": "Allwinner A1.LCD_D3/PD3" PCMBlue1.2 | length 44.7
  FrontLayer w0.2: v1(151.714,155.956) 151.714,157.099
  MidLayer1 w0.2: v1(151.714,155.956) 153.391,157.632 153.391,174.219 PCMBlue1.2@170.815,191.643
"NetAllwinner A1_LCD_D4/PD4": "Allwinner A1.LCD_D4/PD4" PCMBlue1.3 | length 46.2
  FrontLayer w0.2: 152.222,157.099 v1(152.222,159.436)
  MidLayer2 w0.2: v1(152.222,159.436) 152.222,175.438 166.167,189.382 171.094,189.382 PCMBlue1.3@173.355,191.643
"NetAllwinner A1_LCD_D5/PD5": "Allwinner A1.LCD_D5/PD5" PCMBlue1.4 | length 56.6
  FrontLayer w0.2: v1(152.73,154.762) 152.73,157.099
  MidLayer1 w0.2: v1(152.73,154.762) 153.34,154.153 162.839,154.153 171.958,163.271 171.958,168.783 174.676,171.501 174.676,175.031 177.114,177.47 177.114,190.424 PCMBlue1.4@175.895,191.643
"NetAllwinner A1_LCD_D10/PD10": "Allwinner A1.LCD_D10/PD10" PCMGreen1.2 | length 32.7
  FrontLayer w0.2: v1(154.711,155.219) 154.711,157.099
  BackLayer w0.2: v1(154.711,155.219) 154.711,156.591 169.418,171.298 169.418,173.186 170.942,174.71 PCMGreen1.2@170.942,179.324
"NetAllwinner A1_LCD_D11/PD11": "Allwinner A1.LCD_D11/PD11" PCMGreen1.3 | length 34.1
  FrontLayer w0.2: 155.219,157.099 v1(155.219,168.478)
  MidLayer1 w0.2: v1(155.219,168.478) 164.973,178.232 172.39,178.232 PCMGreen1.3@173.482,179.324
"NetAllwinner A1_LCD_D12/PD12": "Allwinner A1.LCD_D12/PD12" PCMGreen1.4 | length 36.6
  FrontLayer w0.2: v1(155.727,155.956) 155.727,157.099
  MidLayer1 w0.2: v1(155.727,155.956) 157.988,158.217 159.918,158.217 165.303,163.601 165.303,172.898 170.129,177.724 174.422,177.724 PCMGreen1.4@176.022,179.324
"NetAllwinner A1_LCD_D13/PD13": "Allwinner A1.LCD_D13/PD13" PCMGreen1.5 | length 43.9
  FrontLayer w0.2: 156.21,157.099 v1(156.21,159.436)
  MidLayer2 w0.2: v1(156.21,159.436) 158.979,162.204 167.437,162.204 169.418,164.186 169.418,165.811 170.231,166.624 178.257,166.624 181.94,170.307 181.94,175.946 PCMGreen1.5@178.562,179.324
"NetAllwinner A1_LCD_D14/PD14": "Allwinner A1.LCD_D14/PD14" PCMGreen1.6 | length 43.7
  FrontLayer w0.2: 156.718,157.099 156.718,155.499 157.277,154.94 158.496,154.94 159.334,155.778 159.334,158.001 160.236,158.902 160.236,161.023 168.046,168.834 178.816,168.834 179.756,169.774 179.756,177.978 PCMGreen1.6@181.102,179.324
"NetAllwinner A1_LCD_D15/PD15": "Allwinner A1.LCD_D15/PD15" PCMRed1.1 | length 18.8
  FrontLayer w0.2: 157.226,157.099 v1(157.226,164.973)
  MidLayer2 w0.2: v1(157.226,164.973) PCMRed1.1@168.148,164.973
"NetAllwinner A1_LCD_D18/PD18": "Allwinner A1.LCD_D18/PD18" PCMRed1.2 | length 17.9
  FrontLayer w0.2: v1(157.709,155.956) 157.709,157.099
  BackLayer w0.2: v1(157.709,155.956) 161.671,155.956 PCMRed1.2@170.688,164.973
"NetAllwinner A1_LCD_D19/PD19": "Allwinner A1.LCD_D19/PD19" PCMRed1.3 | length 18.9
  FrontLayer w0.2: 158.217,157.099 158.217,158.217 v1(159.436,159.436)
  MidLayer2 w0.2: v1(159.436,159.436) 167.691,159.436 PCMRed1.3@173.228,164.973
"NetAllwinner A1_LCD_D21/PD21": "Allwinner A1.LCD_D21/PD21" PCMRed1.4 | length 19.2
  FrontLayer w0.2: 160.655,155.169 165.964,155.169 PCMRed1.4@175.768,164.973
"NetAllwinner A1_LCD_D22/PD22": "Allwinner A1.LCD_D22/PD22" PCMRed1.5 | length 23.4
  FrontLayer w0.2: 160.655,154.661 v1(170.51,154.661)
  MidLayer2 w0.2: v1(170.51,154.661) 178.308,162.458 PCMRed1.5@178.308,164.973
"NetAllwinner A1_LCD_D23/PD23": "Allwinner A1.LCD_D23/PD23" PCMRed1.6 | length 30.1
  FrontLayer w0.2: 160.655,154.153 159.842,154.153 159.842,157.442 160.636,158.236 160.636,159.518 167.437,166.319 179.502,166.319 PCMRed1.6@180.848,164.973
"NetAllwinner A1_LCD_DE/PD25": "Allwinner A1.LCD_DE/PD25" X7.13 | length 73.3
  FrontLayer w0.2: v1(158.775,149.936) 158.775,151.994 159.944,153.162 160.655,153.162
  BackLayer w0.2: v1(158.775,149.936) 171.778,162.939 171.778,166.423 172.032,166.677 172.032,181.328 174.574,183.871 174.574,187.731 174.422,187.884 174.422,200.304 174.346,200.381 174.346,206.477 175.489,207.62 175.489,209.017 176.784,210.312 X7.13@177.662,210.312
"NetAllwinner A1_LCD_HSYNC/PD26": "Allwinner A1.LCD_HSYNC/PD26" X7.14 | length 68.7
  FrontLayer w0.2: 160.655,152.654 v1(163.083,152.654)
  BackLayer w0.2: v1(163.083,152.654) 172.178,161.749 172.178,165.574 174.066,167.462 174.066,171.704 174.396,172.034 174.396,176.293 172.432,178.257 172.432,180.365 177.343,185.276 177.343,200.279 178.918,201.854 178.918,206.477 179.948,207.507 X7.14@179.948,210.312
"NetAllwinner A1_MICIN1": "Allwinner A1.MICIN1" MK1.1 | length 219.9
  FrontLayer w0.2: MK1.1@155.995,219.7 182.382,219.7 198.374,203.708 198.374,103.124 195.453,100.203 165.1,100.203 159.258,106.045 159.258,125.833 v1(155.727,129.364) 156.718,130.355 156.718,131.699
"NetAllwinner A1_SDC0_CLK/PF2": "Allwinner A1.SDC0_CLK/PF2" IC1.6 | length 16.1
  FrontLayer w0.2: v1(159.537,144.149) 160.655,144.149
  MidLayer3 w0.2: v1(159.537,144.149) 162.97,140.716 168.885,140.716 169.799,139.802 IC1.6@169.799,136.906
"NetAllwinner A1_SDC0_CMD/PF3": "Allwinner A1.SDC0_CMD/PF3" IC1.1 | length 17.6
  FrontLayer w0.2: 160.655,144.653 163.881,144.653 166.776,141.757 173.939,141.757 174.879,142.697 IC1.1@174.879,144.526
"NetAllwinner A1_SDC0_D3/PF4": "Allwinner A1.SDC0_D3/PF4" IC1.2 | length 14.6
  FrontLayer w0.2: 160.655,145.161 163.957,145.161 166.827,142.291 171.501,142.291 172.339,143.129 IC1.2@172.339,144.526
"NetAllwinner A1_SDCO_D2/PF5": "Allwinner A1.SDCO_D2/PF5" IC1.5 | length 14.3
  FrontLayer w0.2: 160.655,145.669 v1(165.506,145.669)
  BackLayer w0.2: v1(165.506,145.669) 165.506,140.716 167.259,138.963 IC1.5@167.259,136.906
"NetAllwinner A1_UDP1": "Allwinner A1.UDP1" IC*1.4 U$2.PRTPWR3 U$2.USBDN0 | length 114.9
  FrontLayer w0.2: v1(84.811,177.708) 84.861,177.759 IC*1.4@86.276,177.759 86.843,177.759 86.843,177.927 86.868,177.952 91.415,177.952 92.05,177.317 92.05,175.514 91.703,175.167 U$2.PRTPWR3@90.983,175.167 ; U$2.USBDN0@93.929,163.119 v1(93.929,164.414) ; v1(151.446,137.149) 160.655,137.149
  MidLayer1 w0.2: v1(84.811,177.708) 84.811,176.809 83.718,175.717 83.718,175.209 86.766,172.161 86.766,168.275 91.669,163.373 92.888,163.373 v1(93.929,164.414)
  MidLayer3 w0.2: v1(93.929,164.414) 93.929,157.404 99.162,152.171 136.423,152.171 v1(151.446,137.149)
"NetAllwinner A1_VCC1": "Allwinner A1.VCC1" "Allwinner A1.VCC4_DRAM" "Allwinner A1.VCC5_DRAM" "Allwinner A1.VDD3-INT" "Allwinner A1.VDD4_INT" "Allwinner A1.VDD5_INT" "Allwinner A1.VDD7_CPU" "Allwinner A1.VDD8_CPU" C39.2 C41.2 DDR1.1 DDR1.14 DDR1.27 U5.1 | length 180.6
  FrontLayer w0.2: DDR1.1@135.015,104.586 135.015,103.226 137.022,101.219 146.304,101.219 ; 135.255,153.162 137.435,153.162 138.705,154.432 138.705,156.443 ; 140.705,157.099 140.705,156.464 ; v1(141.199,132.817) 141.205,132.81 141.205,131.699 ; DDR1.14@145.415,104.586 145.415,102.108 146.304,101.219 ; v1(145.705,130.564) 145.705,131.699 ; v1(150.724,152.959) 150.724,156.464 ; v1(158.444,138.149) 160.655,138.149 161.263,138.149 162.103,138.989 162.103,143.336 v1(161.79,143.649) 160.655,143.649 ; v1(168.275,107.798) U5.1@168.275,105.802 ; C41.2@187.452,106.299 186.69,105.537 176.022,105.537 C39.2@175.006,106.553 174.255,105.802 U5.1@168.275,105.802 ; 138.705,156.443 138.705,157.099 138.705,156.443 ; 138.705,156.443 138.989,156.159 140.411,156.159 140.705,156.453 ; 140.705,156.453 140.705,156.464 ; 140.705,156.453 140.705,156.464 ; 140.705,156.464 141.111,156.058 150.317,156.058 150.724,156.464 ; 146.304,101.219 155.448,101.219 ; 146.304,101.219 155.448,101.219 ; 150.724,156.464 150.724,157.099 150.724,156.464 ; 155.448,101.219 155.815,101.586 DDR1.27@155.815,104.586 155.815,105.559 156.058,105.802 U5.1@168.275,105.802
  MidLayer1 w0.2: v1(141.199,132.817) 143.452,132.817 v1(145.705,130.564) 151.828,124.441 151.831,124.441 152.118,124.155 152.118,124.151 168.275,107.994 v1(168.275,107.798) ; v1(150.724,152.959) 157.582,146.101 159.338,146.101 v1(161.79,143.649)
  MidLayer2 w0.2: v1(145.705,130.564) 150.859,130.564 v1(158.444,138.149)
"NetAllwinner A1_VCC2_DRAM": "Allwinner A1.VCC2_DRAM" "Allwinner A1.VCC3_DRAM" C48.2 C50.2 U8.1 | length 145.7
  FrontLayer w0.2: U8.1@60.833,185.79 74.585,185.79 77.368,183.007 102.006,183.007 105.994,179.019 121.234,179.019 123.876,176.378 123.876,173.507 128.092,169.291 C48.2@132.969,169.291 ; v1(134.112,134.137) 134.124,134.149 135.255,134.149 ; 135.255,140.649 v1(138.506,140.649)
  BackLayer w0.2: C48.2@132.969,169.291 132.969,167.132 133.223,166.878 C50.2@133.223,164.719 134.112,163.83 ; v1(134.112,134.137) 134.112,163.83 ; v1(138.506,140.649) 138.506,159.436 134.112,163.83
"NetAllwinner A1_VCC3": "Allwinner A1.VCC3" "Allwinner A1.VCC4" PCMGreen1.1 | length 43.3
  FrontLayer w0.2: 143.705,157.099 143.705,157.912 146.448,160.655 152.883,160.655 154.229,159.309 ; v1(154.229,165.151) 154.229,159.309 ; 154.229,159.309 154.229,157.099 154.229,159.309
  BackLayer w0.2: v1(154.229,165.151) PCMGreen1.1@168.402,179.324
"NetAllwinner A1_VDD6_CPU": "Allwinner A1.VDD6_CPU" C33.2 C35.2 PCMBlue1.11 PCMGreen1.11 PCMRed1.11 U3.1 U$2.VDD33 U$2.VDD33.3 U$2.VDDA33.4 | length 235.2
  FrontLayer w0.2: U3.1@60.198,136.133 65.267,136.133 C33.2@66.04,136.906 75.184,136.906 C35.2@81.407,130.683 ; U$2.VDD33.3@92.608,163.119 v1(92.608,164.414) 93.853,165.659 95.91,165.659 96.52,165.049 ; U$2.VDD33@98.476,178.742 98.476,177.444 96.52,175.489 96.52,165.049 ; v1(143.205,160.63) 143.205,159.257 ; v1(144.12,160.172) 143.205,159.257 ; 96.52,165.049 U$2.VDDA33.4@96.52,163.119 96.52,165.049 ; 143.205,159.257 143.205,157.099 143.205,159.257
  MidLayer2 w0.2: v1(90.399,162.204) 141.63,162.204 v1(143.205,160.63) ; v1(144.12,160.172) 147.193,157.099 152.07,157.099 156.388,161.417 156.388,165.303 159.791,168.707 176.962,168.707 PCMRed1.11@180.848,172.593
  BackLayer w0.2: C35.2@81.407,130.683 81.407,153.213 ; v1(92.608,164.414) v1(90.399,162.204) ; PCMRed1.11@180.848,172.593 179.934,173.507 179.934,185.776 PCMGreen1.11@181.102,186.944 179.807,188.239 179.807,198.095 PCMBlue1.11@180.975,199.263 ; 81.407,153.213 v1(90.399,162.204) ; 81.407,153.213 v1(90.399,162.204)
"NetAllwinner A1_VMIC": "Allwinner A1.VMIC" C8.1 R4.1 | length 94
  FrontLayer w0.2: v1(147.345,216.713) 147.354,216.721 R4.1@147.354,218.093 ; 157.226,131.699 v1(157.226,132.842)
  BackLayer w0.2: v1(147.345,216.713) 147.345,207.874 C8.1@149.606,205.613 145.339,201.346 145.339,144.729 v1(157.226,132.842)